# Altium PCB BRAKELED.PcbDoc
Units mm, origin at the board's own origin, x right, y up, seen from the top; angles counter-clockwise.
Board outline 110.54 x 31.52 mm, 2 copper layers (Top Layer, Bottom Layer); 24 components, 20 nets, 120 pads, 10 vias.
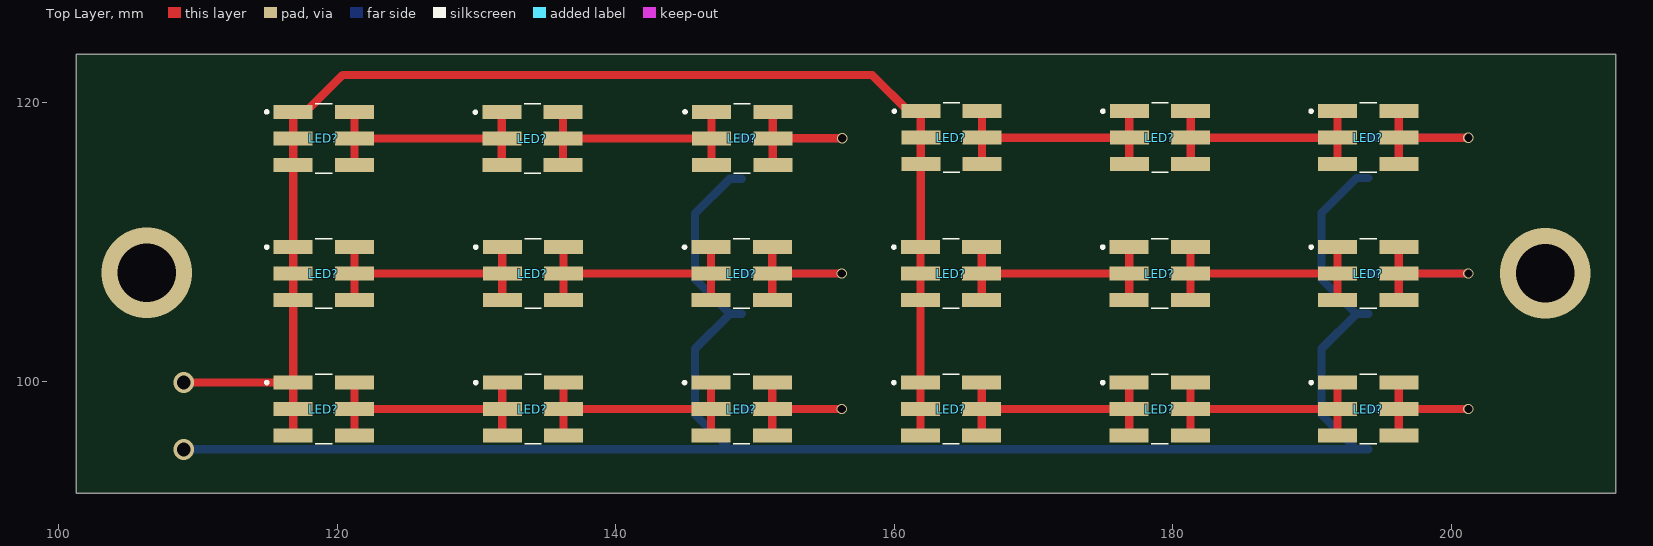
[diagram p0: Top Layer view]
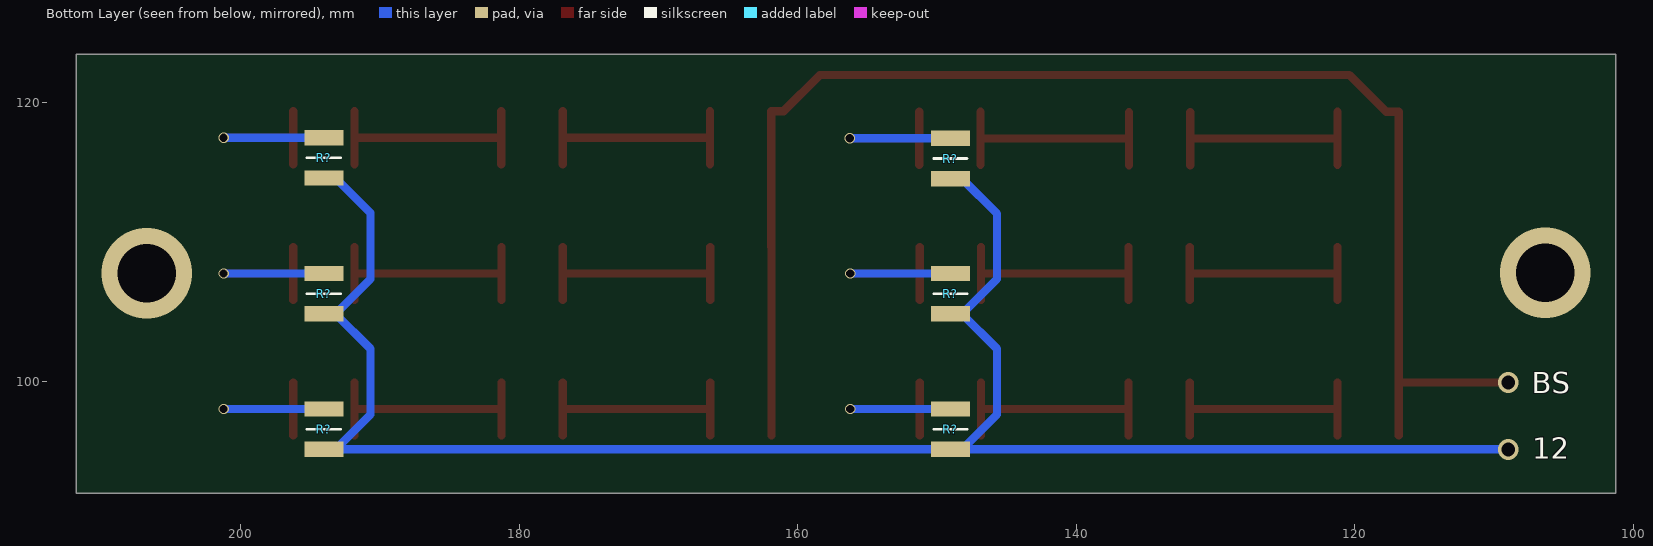
[diagram p1: Bottom Layer view, seen from below]
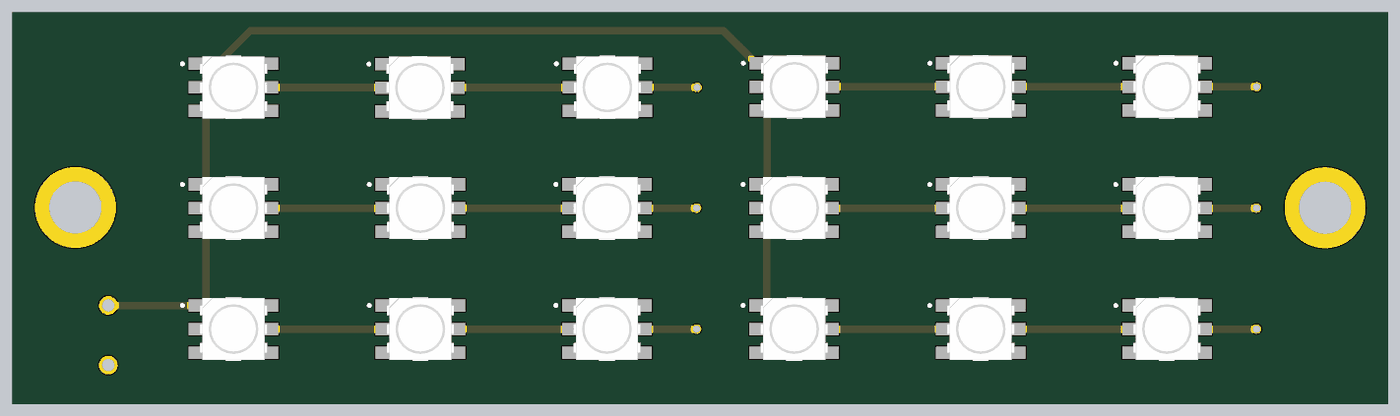
[diagram p2: 3D render of the assembled board from above, using the file's embedded part models]
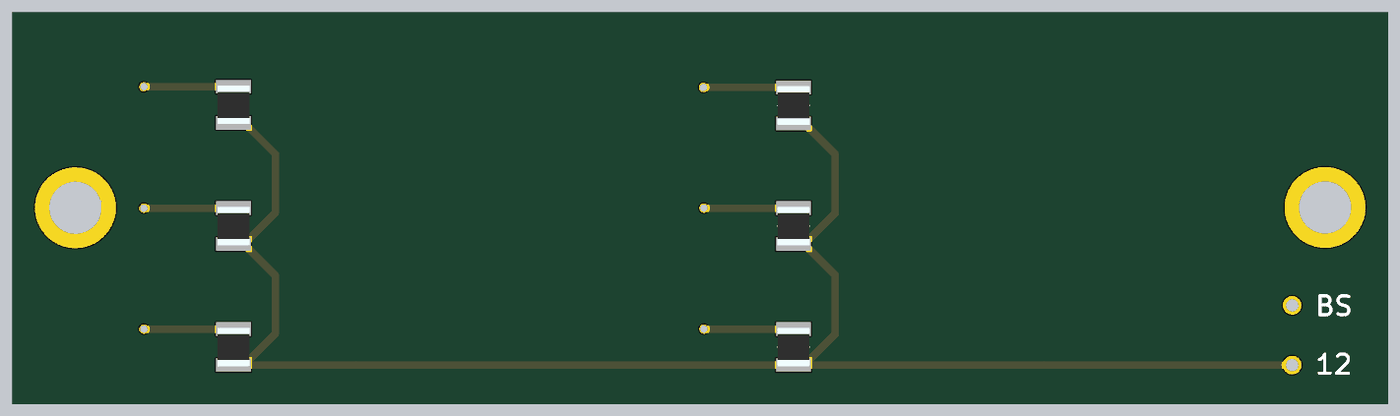
[diagram p3: 3D render of the assembled board from below, using the file's embedded part models]

## Layer stack, top to bottom
Top Solder: solder mask 0.0102, Solder Resist, Dk 3.5
Top Layer: signal copper 0.0356
Dielectric 1: dielectric 0.32, FR-4, Dk 4.8
Bottom Layer: signal copper 0.0356
Bottom Solder: solder mask 0.0102, Solder Resist, Dk 3.5

## Board outline
101.27,91.973 101.27,123.495 211.811,123.495 211.811,91.973

## Design rules (kind name [scope] priority, off if disabled: settings)
Clearance [All] p1: gap=0.254 ignorepadtopadclearanceinfootprint=FALSE except(0: Arc-Hole Track-Hole SMDPad-Hole THPad-Hole Via-Hole Fill-Hole Poly-Hole Region-Hole Text-Hole)
PolygonConnect [All] p1: connectstyle=Relief reliefconductorwidth=0.254 reliefentries=4 polygonreliefangle="90 Angle" airgapwidth=0.254
RoutingVias [All] p1: holewidth=0.6 width=0.75 viastyle="Through Hole" minholewidth=0.6 minwidth=0.75 maxholewidth=0.6 maxwidth=0.75
SolderMaskExpansion [All] p1: expansion=0.102 istentingtop=FALSE
Width [All] p1: maxlimit=0.6 minlimit=0.6 preferedwidth=0.6 minimp=50.000000 maximp=50.000000 favimp=50.000000
30 further rules are at their usual default settings.

## Classes and differential pairs
component class BRAKELED: LED? R?

## Components (designator, comment, footprint, x,y, rotation, side; value= is the part's Value field where it differs from the comment)
LED? "150505M173300" 150505M173300 179.08,117.5 r0 top
LED? "150505M173300" 150505M173300 134.026,117.429 r0 top
LED? "150505M173300" 150505M173300 194.031,117.5 r0 top
LED? "150505M173300" 150505M173300 149.082,117.45 r0 top
LED? "150505M173300" 150505M173300 119.05,117.45 r0 top
LED? "150505M173300" 150505M173300 164.109,117.5 r0 top
LED? "150505M173300" 150505M173300 194.031,98.019 r0 top
LED? "150505M173300" 150505M173300 164.084,98.019 r0 top
LED? "150505M173300" 150505M173300 164.084,107.747 r0 top
LED? "150505M173300" 150505M173300 194.031,107.747 r0 top
LED? "150505M173300" 150505M173300 134.061,98.019 r0 top
LED? "150505M173300" 150505M173300 149.047,98.019 r0 top
LED? "150505M173300" 150505M173300 179.07,107.747 r0 top
LED? "150505M173300" 150505M173300 179.07,98.019 r0 top
LED? "150505M173300" 150505M173300 119.05,98.019 r0 top
LED? "150505M173300" 150505M173300 119.05,107.747 r0 top
LED? "150505M173300" 150505M173300 134.061,107.747 r0 top
LED? "150505M173300" 150505M173300 149.047,107.747 r0 top
R? "RC1210JR-0710KL" RESC3126X60N 149.047,116.002 r270 bottom
R? "RC1210JR-0710KL" RESC3126X60N 194.031,116.053 r270 bottom
R? "RC1210JR-0710KL" RESC3126X60N 149.047,96.571 r270 bottom
R? "RC1210JR-0710KL" RESC3126X60N 194.031,96.571 r270 bottom
R? "RC1210JR-0710KL" RESC3126X60N 194.031,106.299 r270 bottom
R? "RC1210JR-0710KL" RESC3126X60N 149.047,106.299 r270 bottom

## Footprints (in the part's own frame and the unit in brackets; to place one, negate y for a bottom-side part, rotate by r counter-clockwise, add the part's x,y. Pads: shape width x height; smd on the part's side, far side on the other; paste and mask are expansions set on the pad)
150505M173300 [mm]
  rect 2.8x1 smd: 1(-2.2,1.9) 2(2.2,1.9) 3(-2.2,0) 4(2.2,0) 5(-2.2,-1.9) 6(2.2,-1.9)
  silkscreen extent -4.2,-2.5 0.6,2.5, body extent -2.7,-2.5 2.7,2.5, height 1.6
RESC3126X60N [mm]
  rect 1.1x2.8 smd: 1(-1.45,0) 2(1.45,0)
  silkscreen extent 0,-1.2 0,1.2, body extent -1.55,-1.3 1.55,1.3, height 0.6

## Part data
LED? LED? LED? LED? LED? LED?: "LED", Manufacturer_Name="Wurth Elektronik", Mouser Part Number=710-150505M173300, Datasheet Link=https://katalog.we-online.de/led/datasheet/150505M173300.pdf, Height=1.8mm, Manufacturer_Part_Number=150505M173300, Mouser Price/Stock=https://www.mouser.co.uk/ProductDetail/Wurth-Elektronik/150505M173300?qs=fAHHVMwC%252Bbi%2FURn4Qu0%2FAA%3D%3D
LED? LED? LED? LED? LED? LED? LED? LED? LED? LED? LED? LED?: "LED", Manufacturer_Name="Wurth Elektronik", Mouser2 Part Number=710-150505M173300, Datasheet Link=https://componentsearchengine.com//150505M173300.pdf, Height=1.8mm, Manufacturer_Part_Number=150505M173300, Mouser2 Price/Stock=https://www.mouser.com/Search/Refine.aspx?Keyword=710-150505M173300
R? R?: "Resistor", Manufacturer_Name=KEMET, Mouser Part Number=603-RC1210JR-0710KL, Arrow Part Number=RC1210JR-0710KL, Arrow Price/Stock=https://www.arrow.com/en/products/rc1210jr-0710kl/yageo, Datasheet Link=https://datasheet.datasheetarchive.com/originals/distributors/Datasheets_SAMA/902f9e387b938f871d31120f5fc1d65e.pdf, Height=0.6mm, Manufacturer_Part_Number=RC1210JR-0710KL, Mouser Price/Stock=https://www.mouser.co.uk/ProductDetail/YAGEO/RC1210JR-0710KL?qs=6sj9KdP9svgfoubno5Jb%252BA%3D%3D
R? R? R? R?: "Resistor", Manufacturer_Name="YAGEO (PHYCOMP)", Mouser Part Number=603-RC1210JR-0710KL, Arrow Part Number=RC1210JR-0710KL, Arrow Price/Stock=https://www.arrow.com/en/products/rc1210jr-0710kl/yageo, Datasheet Link=http://www.yageo.com/documents/recent/PYu-RC1210_51_RoHS_L_(4).pdf, Height=0.6mm, Manufacturer_Part_Number=RC1210JR-0710KL, Mouser Price/Stock=https://www.mouser.co.uk/ProductDetail/Yageo/RC1210JR-0710KL?qs=6sj9KdP9svgfoubno5Jb%252BA%3D%3D

## Via types
v1: diameter 0.75, hole 0.6, Top Layer to Bottom Layer, 6 vias
v2: diameter 1.5, hole 1, Top Layer to Bottom Layer, 2 vias
v3: diameter 6.5, hole 4.2, Top Layer to Bottom Layer, 2 vias

## Nets (pads, with @x,y where several pads share a name; then routed paths per layer and width w, separated by ;. In a path a pad name is that pad's centre, name@x,y a point inside that pad or via, vN(x,y) a via of type N, cw(c..) or ccw(c..) an arc to the next point about the centre after c; other vN are vias at no path point)
+12: R?.2 | length 135.6
  Bottom Layer w0.6: v2(108.991,95.121) R?.2@148.197,95.121 ; R?.2@149.047,104.849 R?.2@148.197,104.849 ; R?.2@149.047,114.552 148.197,114.552 145.694,112.049 145.694,107.352 R?.2@148.197,104.849 ; R?.2@194.031,95.121 R?.2@193.181,95.121 ; R?.2@194.031,104.849 R?.2@193.181,104.849 ; R?.2@194.031,114.603 193.181,114.603 190.678,112.1 190.678,107.352 R?.2@193.181,104.849 ; R?.2@148.197,95.121 145.694,97.624 145.694,102.346 R?.2@148.197,104.849 ; R?.2@148.197,95.121 149.047,95.121 R?.2@193.181,95.121 ; R?.2@193.181,95.121 190.678,97.624 190.678,102.346 R?.2@193.181,104.849
A: LED?.1@131.861,109.647 LED?.2@121.25,109.647 LED?.3@131.861,107.747 LED?.4@121.25,107.747 LED?.5@131.861,105.847 LED?.6@121.25,105.847 | length 18.2
  Top Layer w0.6: LED?.6@121.25,105.847 LED?.4@121.25,107.747 ; LED?.2@121.25,109.647 LED?.4@121.25,107.747 ; LED?.5@131.861,105.847 LED?.3@131.861,107.747 ; LED?.1@131.861,109.647 LED?.3@131.861,107.747 ; LED?.4@121.25,107.747 LED?.3@131.861,107.747
B: LED?.1@146.847,109.647 LED?.2@136.261,109.647 LED?.3@146.847,107.747 LED?.4@136.261,107.747 LED?.5@146.847,105.847 LED?.6@136.261,105.847 | length 18.2
  Top Layer w0.6: LED?.6@136.261,105.847 LED?.4@136.261,107.747 ; LED?.2@136.261,109.647 LED?.4@136.261,107.747 ; LED?.5@146.847,105.847 LED?.3@146.847,107.747 ; LED?.1@146.847,109.647 LED?.3@146.847,107.747 ; LED?.4@136.261,107.747 LED?.3@146.847,107.747
BS: LED?.1@116.85,99.919 LED?.1@116.85,109.647 LED?.1@116.85,119.35 LED?.1@161.884,99.919 LED?.1@161.884,109.647 LED?.1@161.909,119.4 LED?.3@116.85,98.019 LED?.3@116.85,107.747 LED?.3@116.85,117.45 LED?.3@161.884,98.019 LED?.3@161.884,107.747 LED?.3@161.909,117.5 LED?.5@116.85,96.119 LED?.5@116.85,105.847 LED?.5@116.85,115.55 LED?.5@161.884,96.119 LED?.5@161.884,105.847 LED?.5@161.909,115.6 | length 101.6
  Top Layer w0.6: v2(108.991,99.924) 108.994,99.921 116.847,99.921 LED?.1@116.85,99.919 ; LED?.5@116.85,96.119 116.85,98.019 LED?.1@116.85,99.919 ; LED?.5@161.884,96.119 161.884,98.019 161.884,99.919 161.884,105.847 161.884,107.747 161.884,109.647 161.909,109.672 161.909,115.6 161.909,117.5 161.909,119.4 161.009,119.4 158.414,121.996 120.396,121.996 117.75,119.35 116.85,119.35 116.85,117.45 116.85,115.55 116.85,109.647 116.85,107.747 116.85,105.847 LED?.1@116.85,99.919
C: LED?.2@151.247,109.647 LED?.4@151.247,107.747 LED?.6@151.247,105.847 R?.1@149.047,107.749 | length 16
  Top Layer w0.6: LED?.6@151.247,105.847 LED?.4@151.247,107.747 ; LED?.2@151.247,109.647 LED?.4@151.247,107.747 ; v1(156.247,107.747) LED?.4@151.247,107.747
  Bottom Layer w0.6: R?.1@149.047,107.749 149.048,107.748 v1(156.247,107.747)
D: LED?.1@176.88,119.4 LED?.2@166.309,119.4 LED?.3@176.88,117.5 LED?.4@166.309,117.5 LED?.5@176.88,115.6 LED?.6@166.309,115.6 | length 18.2
  Top Layer w0.6: LED?.6@166.309,115.6 LED?.4@166.309,117.5 ; LED?.2@166.309,119.4 LED?.4@166.309,117.5 ; LED?.5@176.88,115.6 LED?.3@176.88,117.5 ; LED?.1@176.88,119.4 LED?.3@176.88,117.5 ; LED?.4@166.31,117.5 LED?.3@176.88,117.5
E: LED?.1@191.831,119.4 LED?.2@181.28,119.4 LED?.3@191.831,117.5 LED?.4@181.28,117.5 LED?.5@191.831,115.6 LED?.6@181.28,115.6 | length 18.2
  Top Layer w0.6: LED?.6@181.28,115.6 LED?.4@181.28,117.5 ; LED?.2@181.28,119.4 LED?.4@181.28,117.5 ; LED?.5@191.831,115.6 LED?.3@191.831,117.5 ; LED?.1@191.831,119.4 LED?.3@191.831,117.5 ; LED?.4@181.28,117.5 LED?.3@191.83,117.5
F: LED?.2@196.231,119.4 LED?.4@196.231,117.5 LED?.6@196.231,115.6 R?.1@194.031,117.503 | length 16
  Top Layer w0.6: LED?.6@196.231,115.6 LED?.4@196.231,117.5 ; LED?.2@196.231,119.4 LED?.4@196.231,117.5 ; v1(201.231,117.5) LED?.4@196.231,117.5
  Bottom Layer w0.6: R?.1@194.031,117.503 194.032,117.501 201.23,117.501 v1(201.231,117.5)
G: LED?.1@131.826,119.329 LED?.2@121.25,119.35 LED?.3@131.826,117.429 LED?.4@121.25,117.45 LED?.5@131.826,115.529 LED?.6@121.25,115.55 | length 18.2
  Top Layer w0.6: LED?.6@121.25,115.55 LED?.4@121.25,117.45 ; LED?.2@121.25,119.35 LED?.4@121.25,117.45 ; LED?.5@131.826,115.529 LED?.3@131.826,117.429 ; LED?.1@131.826,119.329 LED?.3@131.826,117.429 ; LED?.4@121.25,117.45 121.26,117.439 131.816,117.439 LED?.3@131.826,117.429
H: LED?.1@146.882,119.35 LED?.2@136.226,119.329 LED?.3@146.882,117.45 LED?.4@136.226,117.429 LED?.5@146.882,115.55 LED?.6@136.226,115.529 | length 18.3
  Top Layer w0.6: LED?.6@136.226,115.529 LED?.4@136.226,117.429 ; LED?.2@136.226,119.329 LED?.4@136.226,117.429 ; LED?.5@146.882,115.55 LED?.3@146.882,117.45 ; LED?.1@146.882,119.35 LED?.3@146.882,117.45 ; LED?.4@136.226,117.429 136.236,117.439 146.872,117.439 LED?.3@146.882,117.45
I: LED?.2@151.282,119.35 LED?.4@151.282,117.45 LED?.6@151.282,115.55 R?.1@149.047,117.452 | length 16
  Top Layer w0.6: LED?.6@151.282,115.55 LED?.4@151.282,117.45 ; LED?.2@151.282,119.35 LED?.4@151.282,117.45 ; v1(156.282,117.45) LED?.4@151.282,117.45
  Bottom Layer w0.6: R?.1@149.047,117.452 149.048,117.451 v1(156.282,117.45)
M: LED?.1@176.87,109.647 LED?.2@166.284,109.647 LED?.3@176.87,107.747 LED?.4@166.284,107.747 LED?.5@176.87,105.847 LED?.6@166.284,105.847 | length 18.2
  Top Layer w0.6: LED?.6@166.284,105.847 LED?.4@166.284,107.747 ; LED?.2@166.284,109.647 LED?.4@166.284,107.747 ; LED?.5@176.87,105.847 LED?.3@176.87,107.747 ; LED?.1@176.87,109.647 LED?.3@176.87,107.747 ; LED?.4@166.284,107.747 LED?.3@176.87,107.747
N: LED?.1@191.831,109.647 LED?.2@181.27,109.647 LED?.3@191.831,107.747 LED?.4@181.27,107.747 LED?.5@191.831,105.847 LED?.6@181.27,105.847 | length 18.2
  Top Layer w0.6: LED?.6@181.27,105.847 LED?.4@181.27,107.747 ; LED?.2@181.27,109.647 LED?.4@181.27,107.747 ; LED?.5@191.831,105.847 LED?.3@191.831,107.747 ; LED?.1@191.831,109.647 LED?.3@191.831,107.747 ; LED?.4@181.27,107.747 LED?.3@191.831,107.747
O: LED?.2@196.231,109.647 LED?.4@196.231,107.747 LED?.6@196.231,105.847 R?.1@194.031,107.749 | length 16
  Top Layer w0.6: LED?.6@196.231,105.847 LED?.4@196.231,107.747 ; LED?.2@196.231,109.647 LED?.4@196.231,107.747 ; v1(201.231,107.747) LED?.4@196.231,107.747
  Bottom Layer w0.6: R?.1@194.031,107.749 194.032,107.748 201.23,107.748 v1(201.231,107.747)
P: LED?.1@131.861,99.919 LED?.2@121.25,99.919 LED?.3@131.861,98.019 LED?.4@121.25,98.019 LED?.5@131.861,96.119 LED?.6@121.25,96.119 | length 18.2
  Top Layer w0.6: LED?.6@121.25,96.119 LED?.4@121.25,98.019 ; LED?.2@121.25,99.919 LED?.4@121.25,98.019 ; LED?.5@131.861,96.119 LED?.3@131.861,98.019 ; LED?.1@131.861,99.919 LED?.3@131.861,98.019 ; LED?.4@121.25,98.019 LED?.3@131.861,98.019
Q: LED?.1@146.847,99.919 LED?.2@136.261,99.919 LED?.3@146.847,98.019 LED?.4@136.261,98.019 LED?.5@146.847,96.119 LED?.6@136.261,96.119 | length 18.2
  Top Layer w0.6: LED?.6@136.261,96.119 LED?.4@136.261,98.019 ; LED?.2@136.261,99.919 LED?.4@136.261,98.019 ; LED?.5@146.847,96.119 LED?.3@146.847,98.019 ; LED?.1@146.847,99.919 LED?.3@146.847,98.019 ; LED?.4@136.261,98.019 LED?.3@146.847,98.019
R: LED?.2@151.247,99.919 LED?.4@151.247,98.019 LED?.6@151.247,96.119 R?.1@149.047,98.021 | length 16
  Top Layer w0.6: LED?.6@151.247,96.119 LED?.4@151.247,98.019 ; LED?.2@151.247,99.919 LED?.4@151.247,98.019 ; v1(156.247,98.019) LED?.4@151.247,98.019
  Bottom Layer w0.6: R?.1@149.047,98.021 149.048,98.02 v1(156.247,98.019)
S: LED?.1@176.87,99.919 LED?.2@166.284,99.919 LED?.3@176.87,98.019 LED?.4@166.284,98.019 LED?.5@176.87,96.119 LED?.6@166.284,96.119 | length 18.2
  Top Layer w0.6: LED?.6@166.284,96.119 LED?.4@166.284,98.019 ; LED?.2@166.284,99.919 LED?.4@166.284,98.019 ; LED?.5@176.87,96.119 LED?.3@176.87,98.019 ; LED?.1@176.87,99.919 LED?.3@176.87,98.019 ; LED?.4@166.284,98.019 LED?.3@176.87,98.019
T: LED?.1@191.831,99.919 LED?.2@181.27,99.919 LED?.3@191.831,98.019 LED?.4@181.27,98.019 LED?.5@191.831,96.119 LED?.6@181.27,96.119 | length 18.2
  Top Layer w0.6: LED?.6@181.27,96.119 LED?.4@181.27,98.019 ; LED?.2@181.27,99.919 LED?.4@181.27,98.019 ; LED?.5@191.831,96.119 LED?.3@191.831,98.019 ; LED?.1@191.831,99.919 LED?.3@191.831,98.019 ; LED?.4@181.27,98.019 LED?.3@191.831,98.019
U: LED?.2@196.231,99.919 LED?.4@196.231,98.019 LED?.6@196.231,96.119 R?.1@194.031,98.021 | length 16
  Top Layer w0.6: LED?.6@196.231,96.119 LED?.4@196.231,98.019 ; LED?.2@196.231,99.919 LED?.4@196.231,98.019 ; v1(201.231,98.019) LED?.4@196.231,98.019
  Bottom Layer w0.6: R?.1@194.031,98.021 194.032,98.02 201.23,98.02 v1(201.231,98.019)
copper on no net:
  other v3: 206.731,107.772 106.35,107.798

## Silkscreen, mask and mechanical layers (free items; w line width, h text height)
Bottom Overlay:
  text "BS" at 107.29,99.162 h1.52
  text "12" at 107.264,94.463 h1.52